# EAGLE board M_H_ext_rgb (EAGLE 9.6.2)
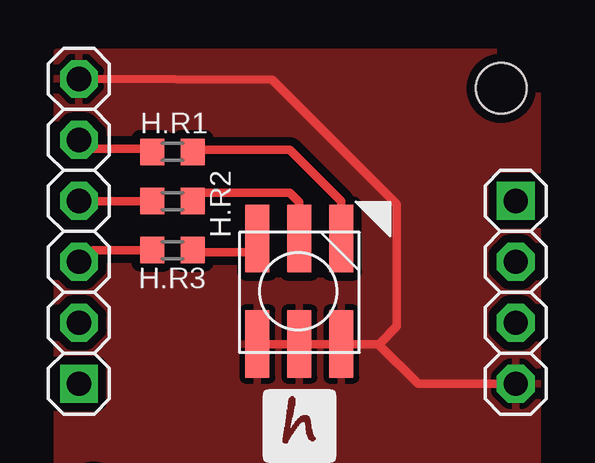
[diagram p0: board, top side]
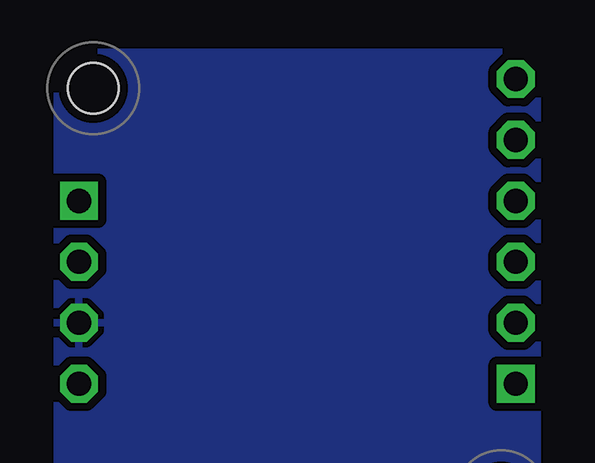
[diagram p1: board, bottom side, seen from below]

No outline drawn. Coordinates in mm, seen from the top.
Copper layers (1*16): Top 0.035mm / dielectric 1.5mm / Bottom 0.035mm
Design rules "default *": minimum track width 14mil, minimum drill 0.35mm, track to track 14mil, track to pad 13mil, pad to pad 10mil, via to via 14mil, smd to smd 14mil, copper to edge 15mil, drill to drill 15mil, minimum pad ring 10mil, minimum via ring 8mil, stop-mask expansion 4mil, vias tented up to drill 0mil, thermal gap 10mil
Holes 2.1 mm at 2,2 19,19

## Footprints (pad centres in the part's own frame; a part is rotated, then mirrored left to right if it is on the bottom)
RGB_WW-FCE50TC-Q1 = smd 1 x 2.8: 1 -1.778,-2.286; 2 -0.028,-2.286; 3 1.722,-2.286; 4 -1.778,2.114; 5 -0.028,2.114; 6 1.722,2.114
1X06 = drill 1.016 pad 1.575 square: 1 -6.35,0 | drill 1.016 pad 1.575 octagon: 2 -3.81,0; 3 -1.27,0; 4 1.27,0; 5 3.81,0; 6 6.35,0
R0603 = smd 1 x 1.1: 1 -0.85,0; 2 0.85,0
1X04 = drill 1.016 pad 1.575 square: 1 -3.81,0 | drill 1.016 pad 1.575 octagon: 2 -1.27,0; 3 1.27,0; 4 3.81,0

## Placement (x,y rotation side)
H.D1  RGB_WW-FCE50TC-Q1  [RGB_WW-FCE50TC-Q1]  10.55,10.45 180 top
H.J2  [1X06]  1.4,13.04 90 top
H.R1  82  [R0603]  5.3,16.35 0 top
H.R2  82  [R0603]  5.3,14.3 0 top
H.R3  82  [R0603]  5.3,12.26 0 top
JP1  [1X04]  19.6,10.5 270 top

## Library data of the parts
H.D1 = hugo
H.J2 JP1 = pinhead2
H.R1-H.R3 = resistor

## Nets
GND: H.D1.4 H.D1.5 H.D1.6 H.J2.6 JP1.4
N$1: H.D1.1 H.R1.2
N$2: H.D1.3 H.R3.2
N$3: H.D1.2 H.R2.2
N$4: H.J2.5 H.R1.1
N$5: H.J2.4 H.R2.1
N$6: H.J2.3 H.R3.1
VDD: JP1.3

## Tracks (layer width: path | path; a pad name or v marks a point on that pad's centre or on a via)
GND
  Top 0.356: H.D1.6 H.D1.5 H.D1.4 13.88,8.34 | 13.88,8.34 13.91,8.34 14.64,9.08 14.64,14.17 14.33,14.49 | H.J2.6 9.47,19.35 14.33,14.49 | 14.34,14.49 14.33,14.49 | JP1.4 15.53,6.69 13.88,8.34
  pour Top (isolate 0.305): 0.5,20.5 0.5,0.5 20.5,0.5 20.5,20.5
N$1
  Top 0.356: 12.38,12.79 H.D1.1 12.33,14.29 10.19,16.43 6.23,16.43 H.R1.2
N$2
  Top 0.356: H.D1.3 8.83,12.59 8.4,12.16 6.26,12.16 H.R3.2
N$3
  Top 0.356: H.D1.2 10.58,14.26 10.19,14.66 6.52,14.66 H.R2.2
N$4
  Top 0.356: H.R1.1 4.33,16.48 1.8,16.48 H.J2.5
N$5
  Top 0.356: H.R2.1 1.53,14.3 H.J2.4
N$6
  Top 0.356: H.R3.1 2,12.26 H.J2.3
VDD
  pour Bottom (isolate 0.305): 0.5,20.5 0.5,0.5 20.5,0.5 20.5,20.5

## Text on the board
tPlace: RGB M.1